# Altium PCB v2.0_stc8a8k64s4a12_coreboard_2021-08-17.pcbdoc
Units mm, origin at the board's own origin, x right, y up, seen from the top; angles counter-clockwise.
Board outline 46.81 x 78.65 mm, 2 copper layers (Top Layer, Bottom Layer); 11 components, 63 nets, 116 pads, 30 vias.
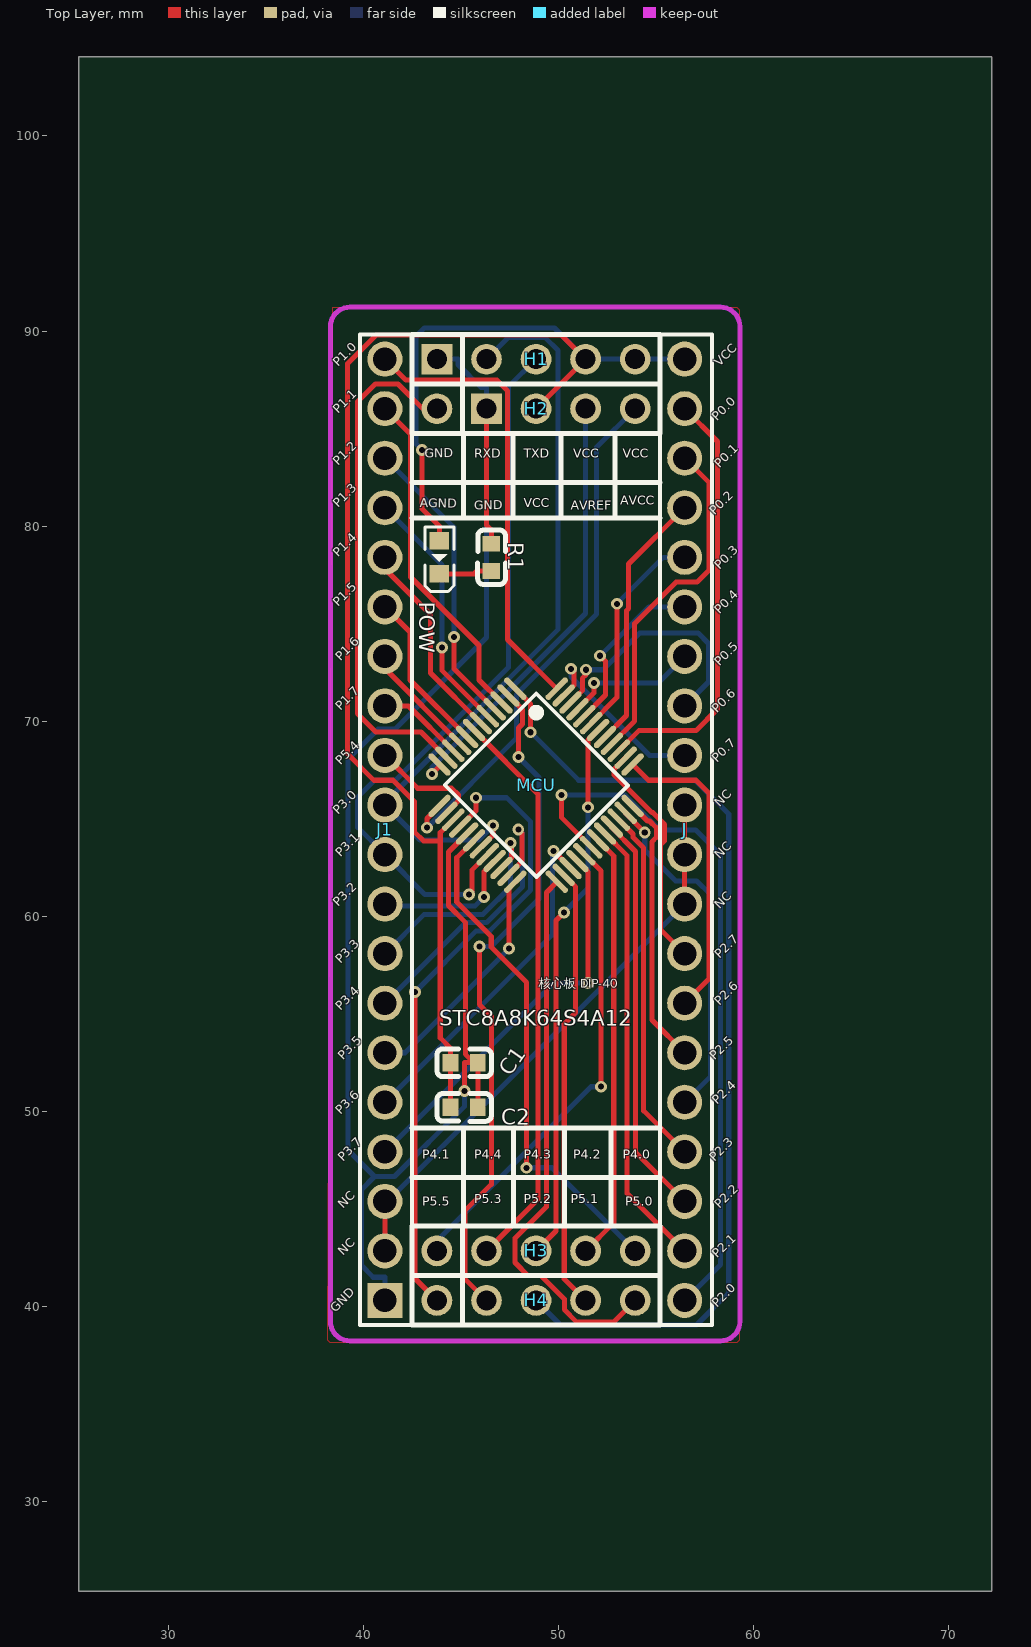
[diagram p0: Top Layer view]
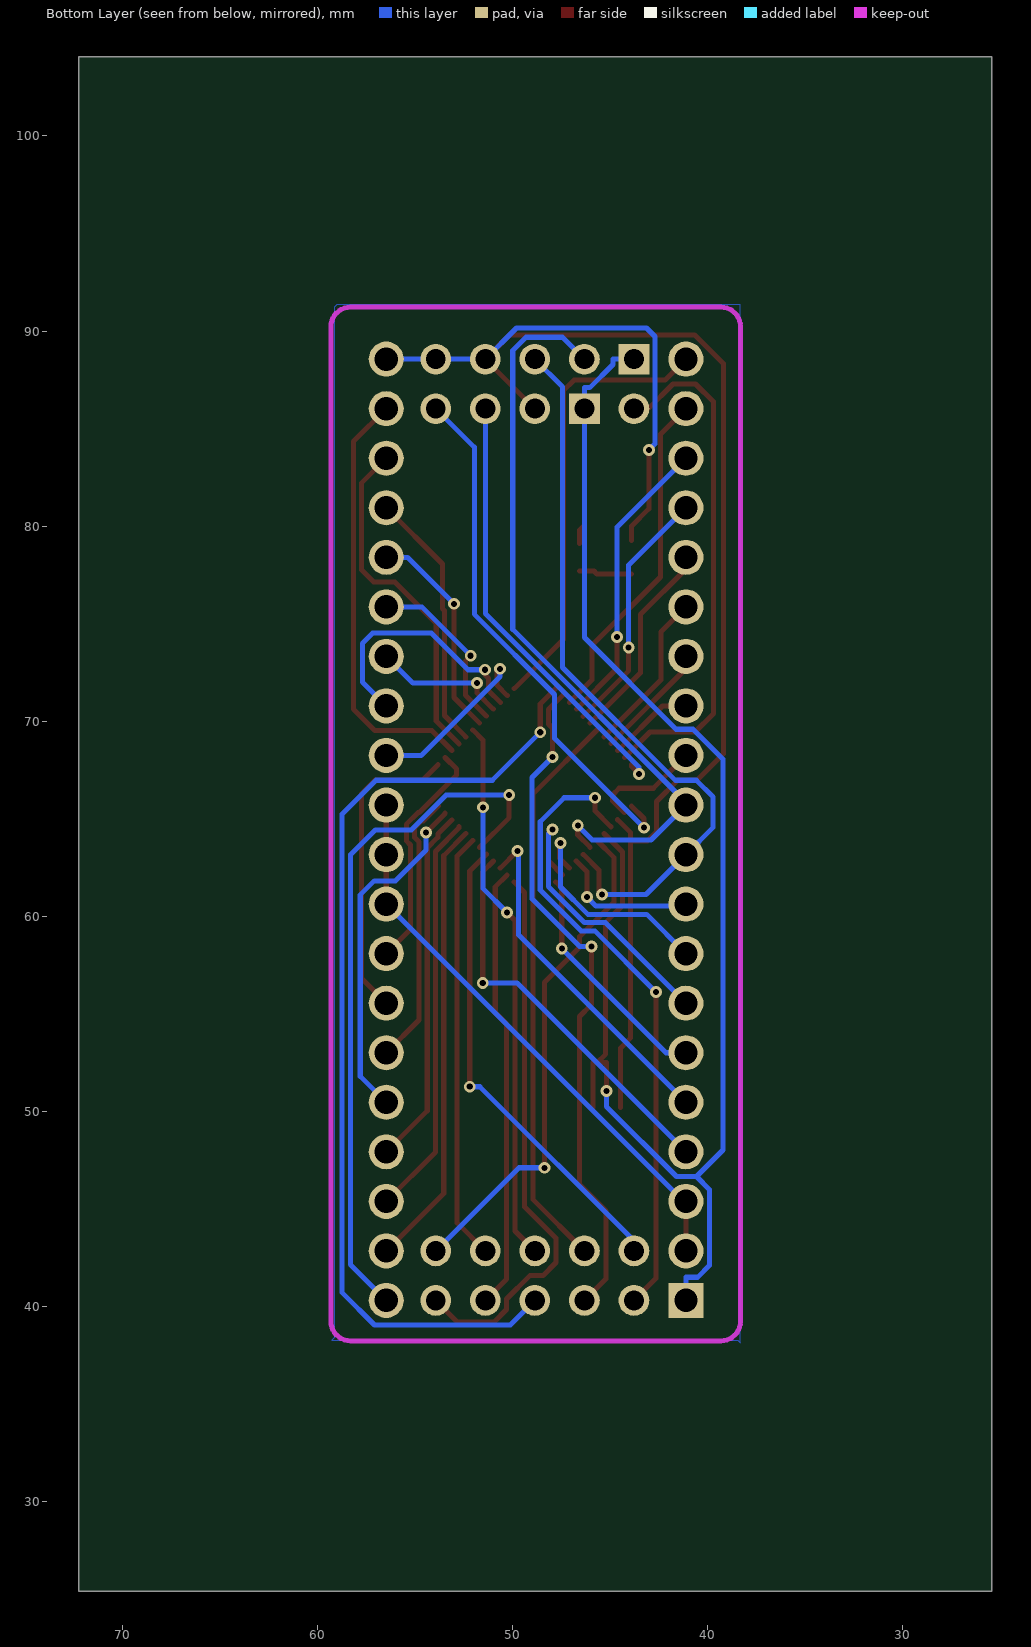
[diagram p1: Bottom Layer view, seen from below]

## Layer stack, top to bottom
Top Layer: signal copper (thickness not stored)
Dielectric: dielectric 0.32, FR-4, Dk 4.8
Bottom Layer: signal copper (thickness not stored)

## Board outline
72.211,25.4 25.4,25.4 25.4,104.054 72.211,104.054

## Components (designator, comment, footprint, x,y, rotation, side; value= is the part's Value field where it differs from the comment)
C1 "100nF" C0603 45.152,52.492 r180 top
C2 "100nF" C0603 45.152,50.206 r180 top
H1 "2185-105SSNAYNT2" HDR-TH_5P-P2.54-V-F#1 48.835,88.56 r0 top
H2 "2185-105SSNAYNT2" HDR-TH_5P-P2.54-V-F#2 48.835,86.02 r0 top
H3 "2185-105SSNAYNT2" HDR-TH_5P-P2.54-V-F#3 48.835,42.84 r0 top
H4 "2185-105SSNAYNT2" HDR-TH_5P-P2.54-V-F#3 48.835,40.3 r0 top
J "Header-Male-2.54_1x20" HDR-TH_20P-P2.54-V#1 56.455,64.43 r270 top
J1 "Header-Male-2.54_1x20" HDR-TH_20P-P2.54-V#2 41.088,64.43 r270 top
MCU "STC8A8K64S4A12-28I-LQFP48" LQFP-48_L7.0-W7.0-P0.50-LS9.0-BL 48.835,66.716 r225 top
POW "led Green" D0603-RD 43.882,78.4 r90 top
R1 "1k" C0603 46.549,78.4 r270 top

## Footprints (in the part's own frame and the unit in brackets; to place one, negate y for a bottom-side part, rotate by r counter-clockwise, add the part's x,y. Pads: shape width x height; smd on the part's side, far side on the other; paste and mask are expansions set on the pad)
C0603 [mm]
  rect 0.8x0.9 smd: 1(-0.7,0) 2(0.7,0)
  silkscreen extent -1.4,-0.7 1.4,0.72
D0603-RD [mm]
  rect 0.9x1 smd: 1(-0.85,0) 2(0.85,0)
  silkscreen extent -1.75,-0.75 1.55,0.75
HDR-TH_5P-P2.54-V-F#1 [mil]
  rect 62x62 hole 40.16: 1(-200,0)
  round 62 hole 40.16: 2(-100,0) 3(0,0) 4(100,0) 5(200,0)
  silkscreen extent -250,-50 250,50
HDR-TH_5P-P2.54-V-F#2 [mil]
  round 62 hole 40.16: 1(-200,0) 3(0,0) 4(100,0) 5(200,0)
  rect 62x62 hole 40.16: 2(-100,0)
  silkscreen extent -250,-50 250,50
HDR-TH_5P-P2.54-V-F#3 [mil]
  round 62 hole 40.16: 1(-200,0) 2(-100,0) 3(0,0) 4(100,0) 5(200,0)
  silkscreen extent -250,-50 250,50
HDR-TH_20P-P2.54-V#1 [mm]
  round 1.8 hole 1.2: 1(-24.13,0) 2(-21.59,0) 3(-19.05,0) 4(-16.51,0) 5(-13.97,0) 6(-11.43,0) 7(-8.89,0) 8(-6.35,0) 9(-3.81,0) 10(-1.27,0) 11(1.27,0) 12(3.81,0) 13(6.35,0) 14(8.89,0) 15(11.43,0) 16(13.97,0) 17(16.51,0) 18(19.05,0) 19(21.59,0) 20(24.13,0)
  silkscreen extent -25.4,-1.27 25.4,1.4
HDR-TH_20P-P2.54-V#2 [mm]
  round 1.8 hole 1.2: 1(-24.13,0) 2(-21.59,0) 3(-19.05,0) 4(-16.51,0) 5(-13.97,0) 6(-11.43,0) 7(-8.89,0) 8(-6.35,0) 9(-3.81,0) 10(-1.27,0) 11(1.27,0) 12(3.81,0) 13(6.35,0) 14(8.89,0) 15(11.43,0) 16(13.97,0) 17(16.51,0) 18(19.05,0) 19(21.59,0)
  rect 1.8x1.8 hole 1.2: 20(24.13,0)
  silkscreen extent -25.4,-1.27 25.4,1.4
LQFP-48_L7.0-W7.0-P0.50-LS9.0-BL [mm]
  oval 0.3x1.5 smd: 1(-2.75,-4.25) 2(-2.25,-4.25) 3(-1.75,-4.25) 4(-1.25,-4.25) 5(-0.75,-4.25) 6(-0.25,-4.25) 7(0.25,-4.25) 8(0.75,-4.25) 9(1.25,-4.25) 10(1.75,-4.25) 11(2.25,-4.25) 12(2.75,-4.25) 25(2.75,4.25) 26(2.25,4.25) 27(1.75,4.25) 28(1.25,4.25) 29(0.75,4.25) 30(0.25,4.25) 31(-0.25,4.25) 32(-0.75,4.25) 33(-1.25,4.25) 34(-1.75,4.25) 35(-2.25,4.25) 36(-2.75,4.25)
  oval 1.5x0.3 smd: 13(4.25,-2.75) 14(4.25,-2.25) 15(4.25,-1.75) 16(4.25,-1.25) 17(4.25,-0.75) 18(4.25,-0.25) 19(4.25,0.25) 20(4.25,0.75) 21(4.25,1.25) 22(4.25,1.75) 23(4.25,2.25) 24(4.25,2.75) 37(-4.25,2.75) 38(-4.25,2.25) 39(-4.25,1.75) 40(-4.25,1.25) 41(-4.25,0.75) 42(-4.25,0.25) 43(-4.25,-0.25) 44(-4.25,-0.75) 45(-4.25,-1.25) 46(-4.25,-1.75) 47(-4.25,-2.25) 48(-4.25,-2.75)
  silkscreen extent -3.33,-3.31 3.3,3.34

## Via types
v1: diameter 0.61, hole 0.31, Top Layer to Bottom Layer, 30 vias

## Nets (pads, with @x,y where several pads share a name; then routed paths per layer and width w, separated by ;. In a path a pad name is that pad's centre, name@x,y a point inside that pad or via, vN(x,y) a via of type N, cw(c..) or ccw(c..) an arc to the next point about the centre after c; other vN are vias at no path point)
AGND: H2.1 MCU.11 | length 26.5
  Top Layer w0.26: H2.1 43.029,86.02 41.759,87.29 40.596,87.29 39.681,86.376 39.681,70.381 40.624,69.439 42.933,69.439 MCU.11@44.246,68.126
AVCC: H2.5 MCU.13 | length 27.3
  Top Layer w0.26: v1(43.245,64.537) 43.245,65.012 MCU.13@43.888,65.654
  Bottom Layer w0.26: v1(43.245,64.537) 47.825,69.119 47.825,71.369 51.939,75.484 51.939,84.044 H2.5
AVREF: H2.4 MCU.12 | length 22.6
  Top Layer w0.26: v1(43.496,67.285) 43.89,67.681 MCU.12@43.89,67.773
  Bottom Layer w0.26: v1(43.496,67.285) 43.496,67.638 51.375,75.517 H2.4
GND: C1.1 C2.1 H1.1 H2.2 J1.20 MCU.17 R1.1 | length 86.3
  Top Layer w0.26: v1(45.16,51.044) 45.16,52.492 C1.1@45.645,52.492 ; MCU.17@45.295,64.237 44.347,63.29 44.347,60.549 45.208,59.688 45.208,52.929 C1.1@45.645,52.492 ; C2.1@45.854,50.206 45.854,52.492 C1.1@45.645,52.492 ; H2.2 46.295,80.046 46.549,79.792 R1.1
  Bottom Layer w0.26: J1.20 41.088,41.491 40.492,41.491 39.885,42.101 39.885,45.982 40.553,46.65 ; H1.1 44.835,88.56 44.835,88.291 46.026,87.099 46.295,87.099 46.295,86.558 H2.2 46.295,74.283 41.599,69.586 40.73,69.586 39.194,68.049 39.194,48.009 40.553,46.65 ; v1(45.16,51.044) 45.16,50.234 41.576,46.65 40.553,46.65
NC: J1.18 J1.19 J.10 J.11 J.12 | length 29.3
  Top Layer w0.26: J1.19 J1.18 ; J.12 J.11 J.10
  Bottom Layer w0.26: J1.18 41.215,45.38 J.12
P0.0: J.2 MCU.39 | length 22
  Top Layer w0.26: MCU.39@53.087,68.491 54.106,69.51 57.035,69.51 58.142,70.617 58.142,84.333 J.2
P0.1: J.3 MCU.40 | length 17.9
  Top Layer w0.26: MCU.40@52.722,68.837 53.893,70.008 53.893,75.001 56.021,77.13 57.098,77.13 57.718,77.752 57.718,82.218 J.3
P0.2: J.4 MCU.41 | length 13.4
  Top Layer w0.26: MCU.41@52.379,69.198 53.468,70.287 53.468,75.662 53.575,75.769 53.575,78.06 J.4
P0.3: J.5 MCU.43 | length 11.1
  Top Layer w0.26: MCU.43@51.665,69.896 52.978,71.209 v1(52.978,76.017)
  Bottom Layer w0.26: v1(52.978,76.017) 55.361,78.4 J.5
P0.4: J.6 MCU.44 | length 9
  Top Layer w0.26: MCU.44@51.315,70.257 52.402,71.344 52.402,73.074 v1(52.125,73.353)
  Bottom Layer w0.26: v1(52.125,73.353) 54.632,75.86 J.6
P0.5: J.7 MCU.45 | length 6.9
  Top Layer w0.26: MCU.45@50.967,70.612 51.805,71.451 v1(51.805,71.948)
  Bottom Layer w0.26: v1(51.805,71.948) 55.084,71.948 J.7
P0.6: J.8 MCU.46 | length 13
  Top Layer w0.26: MCU.46@50.606,70.963 51.208,71.562 51.208,72.195 51.398,72.388 v1(51.398,72.634)
  Bottom Layer w0.26: v1(51.398,72.634) 52.27,72.634 54.149,74.514 57.149,74.514 57.682,73.98 57.682,72.007 J.8
P0.7: J.9 MCU.47 | length 9.6
  Top Layer w0.26: MCU.47@50.245,71.308 50.773,71.834 50.773,72.54 v1(50.626,72.685)
  Bottom Layer w0.26: v1(50.626,72.685) 50.626,72.281 54.667,68.24 J.9
P1.0: J1.1 MCU.48 | length 23.3
  Top Layer w0.26: J1.1 42.168,87.48 46.829,87.48 47.375,86.934 47.375,74.186 MCU.48@49.897,71.664
P1.1: J1.2 MCU.3 | length 17.5
  Top Layer w0.26: J1.2 42.394,84.714 42.394,77.394 45.914,73.874 45.914,72.113 MCU.3@47.065,70.965
P1.2: J1.3 MCU.4 | length 15.2
  Top Layer w0.26: v1(44.622,74.308) 44.622,72.695 MCU.4@46.704,70.612
  Bottom Layer w0.26: J1.3 44.622,79.947 v1(44.622,74.308)
P1.3: J1.4 MCU.5 | length 12.9
  Top Layer w0.26: v1(44.025,73.767) 44.025,72.586 MCU.5@46.359,70.249
  Bottom Layer w0.26: J1.4 44.025,78.004 v1(44.025,73.767)
P1.4: J1.5 MCU.6 | length 10.5
  Top Layer w0.26: J1.5 41.088,77.801 43.428,75.464 43.428,72.474 MCU.6@46.006,69.896
P1.5: J1.6 MCU.8 | length 8.4
  Top Layer w0.26: J1.6 42.379,74.57 42.379,72.113 MCU.8@45.302,69.192
P1.6: J1.7 MCU.9 | length 6.1
  Top Layer w0.26: J1.7 41.088,72.695 MCU.9@44.939,68.847
P1.7: J1.8 MCU.10 | length 4.4
  Top Layer w0.26: J1.8 42.295,70.78 MCU.10@44.586,68.486
P2.0: J.20 MCU.30 | length 36.3
  Top Layer w0.26: v1(50.151,66.213) 50.151,65.05 MCU.30@51.673,63.528
  Bottom Layer w0.26: v1(50.151,66.213) 53.385,66.213 55.165,64.43 57.012,64.43 58.292,63.15 58.292,42.136 J.20
P2.1: J.19 MCU.32 | length 23.1
  Top Layer w0.26: MCU.32@52.376,64.237 53.507,63.104 53.507,45.789 J.19
P2.2: J.18 MCU.33 | length 20.8
  Top Layer w0.26: MCU.33@52.724,64.593 52.724,64.529 53.931,63.323 53.931,47.905 J.18
P2.3: J.17 MCU.34 | length 18.4
  Top Layer w0.26: MCU.34@53.087,64.941 53.811,64.217 53.811,64.041 54.352,63.498 54.352,50.023 J.17
P2.4: J.16 MCU.35 | length 17.8
  Top Layer w0.26: MCU.35@53.435,65.296 53.435,65.261 v1(54.408,64.288)
  Bottom Layer w0.26: v1(54.408,64.288) 54.408,63.391 55.986,61.811 57.068,61.811 57.786,61.095 57.786,51.788 J.16
P2.5: J.15 MCU.36 | length 14
  Top Layer w0.26: MCU.36@53.788,65.652 54.556,64.885 54.655,64.885 55.005,64.537 55.005,64.041 54.777,63.81 54.777,54.679 J.15
P2.6: J.14 MCU.37 | length 15.8
  Top Layer w0.26: MCU.37@53.791,67.78 54.601,66.97 57.035,66.97 57.718,66.287 57.718,56.802 J.14
P2.7: J.13 MCU.38 | length 12
  Top Layer w0.26: MCU.38@53.44,68.138 52.844,67.541 52.844,67.242 54.777,65.309 54.83,65.309 55.427,64.712 55.427,63.866 55.208,63.648 55.208,59.327 J.13
P3.0: H1.2 J1.10 MCU.19 | length 39.4
  Top Layer w0.26: MCU.19@45.998,63.528 46.636,64.166 v1(46.636,64.646)
  Bottom Layer w0.26: H1.2 47.418,89.68 49.288,89.68 49.968,89.002 49.968,74.707 41.088,65.83 J1.10 42.884,63.904 45.894,63.904 v1(46.636,64.646)
P3.1: H1.3 J1.11 MCU.20 | length 38
  Top Layer w0.26: v1(45.394,61.113) 45.544,61.263 45.544,62.362 MCU.20@46.354,63.173
  Bottom Layer w0.26: v1(45.394,61.113) 43.136,61.113 J1.11 39.694,64.554 39.694,66.106 40.558,66.97 41.632,66.97 47.416,72.754 47.416,87.14 H1.3
P3.2: J1.12 MCU.21 | length 7.4
  Top Layer w0.26: v1(46.166,60.986) 46.166,62.281 MCU.21@46.715,62.83
  Bottom Layer w0.26: J1.12 41.193,60.516 45.696,60.516 v1(46.166,60.986)
P3.3: J1.13 MCU.22 | length 11.6
  Top Layer w0.26: MCU.22@47.06,62.464 47.581,62.987 47.581,63.704 v1(47.525,63.759)
  Bottom Layer w0.26: J1.13 43.103,60.094 46.118,60.094 47.525,61.501 v1(47.525,63.759)
P3.4: J1.14 MCU.23 | length 15.3
  Top Layer w0.26: MCU.23@47.413,62.111 48.127,62.827 48.127,64.252 v1(47.926,64.453)
  Bottom Layer w0.26: J1.14 45.219,59.67 46.293,59.67 48.137,61.514 48.137,64.242 v1(47.926,64.453)
P3.5: J1.15 MCU.24 | length 12.1
  Top Layer w0.26: v1(47.456,58.344) 47.456,61.448 MCU.24@47.771,61.76
  Bottom Layer w0.26: J1.15 42.115,53 v1(47.456,58.344)
P3.6: J1.16 MCU.27 | length 17.7
  Top Layer w0.26: v1(49.732,63.343) MCU.27@50.611,62.464
  Bottom Layer w0.26: J1.16 49.671,59.043 49.671,63.282 v1(49.732,63.343)
P3.7: J1.17 MCU.28 | length 20.5
  Top Layer w0.26: MCU.28@50.954,62.832 51.508,62.276 v1(51.508,56.574)
  Bottom Layer w0.26: J1.17 49.742,56.574 v1(51.508,56.574)
P4.0: H3.5 MCU.18 | length 26
  Top Layer w0.26: MCU.18@45.655,63.886 44.771,63.003 44.771,60.724 46.539,58.956 46.539,58.418 48.345,56.609 v1(48.345,47.102)
  Bottom Layer w0.26: v1(48.345,47.102) 49.653,47.102 H3.5
P4.1: H3.1 MCU.29 | length 24.5
  Top Layer w0.26: MCU.29@51.315,63.175 52.173,62.317 v1(52.173,51.258)
  Bottom Layer w0.26: H3.1 43.755,43.358 51.655,51.258 v1(52.173,51.258)
P4.2: H3.4 MCU.31 | length 22
  Top Layer w0.26: H3.4 52.818,44.283 52.818,63.084 MCU.31@52.021,63.881
P4.3: H3.3 MCU.42 | length 28
  Top Layer w0.26: H3.3 49.857,43.861 49.857,59.782 v1(50.268,60.193) ; v1(51.502,65.583) 51.502,69.032 MCU.42@52.023,69.553
  Bottom Layer w0.26: v1(50.268,60.193) 51.502,61.428 v1(51.502,65.583)
P4.4: H3.2 MCU.7 | length 29.2
  Top Layer w0.26: MCU.7@45.655,69.546 48.942,66.259 48.942,45.487 H3.2
P5.0: H4.5 MCU.25 | length 28.6
  Top Layer w0.26: MCU.25@49.905,61.76 49.366,61.219 49.366,45.106 47.756,43.495 47.756,42.241 48.424,41.57 49.095,41.57 50.286,40.379 50.286,39.833 50.928,39.187 52.805,39.187 H4.5
P5.1: H4.4 MCU.26 | length 22.8
  Top Layer w0.26: MCU.26@50.255,62.116 50.867,61.504 50.867,55.06 50.281,54.473 50.281,41.395 H4.4
P5.2: H4.3 MCU.1 | length 50.1
  Top Layer w0.26: MCU.1@47.779,71.661 48.559,70.879 v1(48.559,69.431)
  Bottom Layer w0.26: v1(48.559,69.431) 51.02,66.97 56.986,66.97 58.716,65.24 58.716,40.699 57.057,39.04 50.095,39.04 H4.3
P5.3: H4.2 MCU.2 | length 34.7
  Top Layer w0.26: v1(45.942,58.448) 45.942,55.464 46.544,54.859 46.544,46.254 45.185,44.892 45.185,41.41 H4.2 ; MCU.2@47.426,71.306 48.137,70.595 48.137,69.853 47.934,69.65 v1(47.934,68.166)
  Bottom Layer w0.26: v1(45.942,58.448) 46.539,58.448 48.983,60.889 48.983,67.115 v1(47.934,68.166)
P5.4: J1.9 MCU.14 | length 5.8
  Top Layer w0.26: J1.9 42.767,66.561 44.51,66.561 44.855,66.218 44.855,65.918 MCU.14@44.248,65.311
P5.5: H4.1 MCU.16 | length 33
  Top Layer w0.26: v1(42.635,56.114) 42.635,41.42 H4.1 ; MCU.16@44.939,64.585 45.752,65.4 v1(45.752,66.073)
  Bottom Layer w0.26: v1(42.635,56.114) 45.767,59.248 46.468,59.248 48.559,61.339 48.559,64.847 47.332,66.073 v1(45.752,66.073)
POW_1: POW.1 R1.2 | length 2.7
  Top Layer w0.26: POW.1@43.882,77.549 45.658,77.549 45.808,77.699 R1.2@46.549,77.699
S$68: 
S$1668: 
S$1673: 
S$1675: 
S$1677: 
S$1679: 
S$1682: 
S$1684: 
S$1686: 
S$1688: 
S$1690: 
S$1692: 
S$1694: 
VCC: C1.2 C2.2 H1.4 H1.5 H2.3 J.1 MCU.15 POW.2 | length 85.3
  Top Layer w0.26: v1(42.991,83.904) 42.991,80.884 43.882,79.993 POW.2 ; C2.2 C1.2 44.451,53.234 43.926,53.762 43.926,63.864 ; MCU.15@44.589,64.946 43.926,64.28 43.926,63.864 ; H2.3 H1.4 50.133,89.802 40.641,89.802 39.168,88.326 39.168,68.324 40.522,66.97 41.508,66.97 42.597,65.883 42.597,64.331 43.065,63.864 43.926,63.864
  Bottom Layer w0.26: v1(42.991,83.904) 42.676,84.222 42.676,89.726 43.108,90.158 49.778,90.158 H1.4 H1.5 J.1

## Polygon pours and split planes (outlines as drawn)
GND on Bottom Layer (solid): 38.294,91.354 58.995,91.354 59.122,91.227 59.122,38.395 59.249,38.268 38.421,38.268 38.294,38.141
GND on Top Layer (solid): 38.421,91.227 59.122,91.227 59.249,91.1 59.249,38.268 59.122,38.141 38.294,38.141 38.167,38.268 38.167,38.395

## Keep-outs
Keep-Out Layer:
  lines w0.254: 38.292,39.227 ccw(c39.292,39.227) 39.292,38.227 ; 38.292,90.227 cw(c39.292,90.227) 39.292,91.227 ; 58.292,38.227 ccw(c58.292,39.227) 59.292,39.227 ; 58.292,91.227 cw(c58.292,90.227) 59.292,90.227

## Silkscreen, mask and mechanical layers (free items; w line width, h text height)
Top Overlay:
  lines w0.254 net S$1668: 42.485,82.231 55.185,82.231
  lines w0.254 net S$1673: 42.485,80.417 55.185,80.417
  lines w0.254 net S$1675: 45.125,80.559 45.125,84.75
  lines w0.254 net S$1677: 47.647,80.417 47.647,84.75
  lines w0.254 net S$1679: 50.114,80.417 50.114,84.75
  lines w0.254 net S$1682: 52.89,80.417 52.89,84.75
  lines w0.254 net S$1684: 42.485,49.133 55.185,49.133
  lines w0.254 net S$1686: 42.485,46.593 55.185,46.593
  lines w0.254 net S$1688: 52.679,44.11 52.679,49.133
  lines w0.254 net S$1690: 50.284,44.11 50.284,49.133
  lines w0.254 net S$1692: 47.69,44.11 47.69,49.133
  lines w0.254 net S$1694: 45.114,44.11 45.114,49.133
  text "P1.0" at 38.802,88.052 h0.8 r45
  text "VCC" at 58.36,88.052 h0.8 r45
  text "P1.1" at 38.802,85.639 h0.8 r45
  text "P0.0" at 58.233,85.258 h0.8 r45
  text "GND" at 43.12,83.353 h0.8 r1
  text "RXD" at 45.66,83.353 h0.8
  text "TXD" at 48.2,83.353 h0.8
  text "VCC" at 50.74,83.353 h0.8
  text "VCC" at 53.28,83.353 h0.8
  text "P1.2" at 38.802,82.972 h0.8 r45
  text "P0.1" at 58.36,82.845 h0.8 r45
  text "AVCC" at 53.153,80.94 h0.8
  text "P1.3" at 38.802,80.813 h0.8 r45
  text "AGND" at 42.866,80.813 h0.8 r359
  text "VCC" at 48.2,80.813 h0.8
  text "GND" at 45.66,80.686 h0.8 r1
  text "AVREF" at 50.613,80.686 h0.8
  text "P0.2" at 58.106,80.432 h0.8 r45
  text "P1.4" at 38.802,78.273 h0.8 r45
  text "P0.3" at 58.36,77.638 h0.8 r45
  text "P1.5" at 38.802,75.733 h0.8 r45
  text "P0.4" at 58.36,75.352 h0.8 r45
  text "P1.6" at 38.929,72.939 h0.8 r45
  text "P0.5" at 58.36,72.685 h0.8 r45
  text "P1.7" at 38.929,70.399 h0.8 r45
  text "P0.6" at 58.233,70.272 h0.8 r45
  text "P0.7" at 58.233,67.732 h0.8 r45
  text "P5.4" at 38.929,67.605 h0.8 r45
  text "NC" at 58.36,65.446 h0.8 r45
  text "P3.0" at 38.802,65.065 h0.8 r45
  text "P3.1" at 38.929,62.906 h0.8 r45
  text "NC" at 58.36,62.779 h0.8 r45
  text "P3.2" at 38.802,60.366 h0.8 r45
  text "NC" at 58.36,60.239 h0.8 r45
  text "P2.7" at 58.36,57.699 h0.8 r44
  text "P3.3" at 38.929,57.445 h0.8 r45
  text "核心板 DIP-40" at 48.962,56.175 h0.8
  text "P2.6" at 58.36,55.286 h0.8 r45
  text "P3.4" at 38.929,55.032 h0.8 r45
  text "STC8A8K64S4A12" at 43.882,54.378 h0.8
  text "P3.5" at 39.056,52.492 h0.8 r45
  text "P2.5" at 58.106,52.492 h0.8 r44
  text "P2.4" at 58.233,50.206 h0.8 r44
  text "P3.6" at 38.929,49.698 h0.8 r45
  text "P4.1" at 42.993,47.412 h0.8
  text "P4.4" at 45.66,47.412 h0.8
  text "P4.3" at 48.2,47.412 h0.8
  text "P4.2" at 50.74,47.412 h0.8
  text "P4.0" at 53.28,47.412 h0.8
  text "P3.7" at 39.056,47.285 h0.8 r45
  text "P2.3" at 58.106,47.285 h0.8 r45
  text "P5.3" at 45.66,45.126 h0.8
  text "P5.2" at 48.2,45.126 h0.8
  text "P5.1" at 50.613,45.126 h0.8
  text "P5.5" at 42.993,44.999 h0.8
  text "P5.0" at 53.407,44.999 h0.8
  text "NC" at 39.056,44.872 h0.8 r45
  text "P2.2" at 58.36,44.872 h0.8 r45
  text "NC" at 39.056,42.459 h0.8 r45
  text "P2.1" at 58.233,42.332 h0.8 r44
  text "P2.0" at 58.233,39.792 h0.8 r45
  text "GND" at 38.675,39.538 h0.8 r46
Document:
  lines w0.003: 48.78,64.702 48.831,64.752